# Altium PCB pcb_emmeteur.PcbDoc
Units mil, origin at the board's own origin, x right, y up, seen from the top; angles counter-clockwise.
Board outline 2625 x 2355 mil, 4 copper layers (Top Layer, Internal Plane 1, Internal Plane 2, Bottom Layer); 28 components, 22 nets, 93 pads, 0 vias.
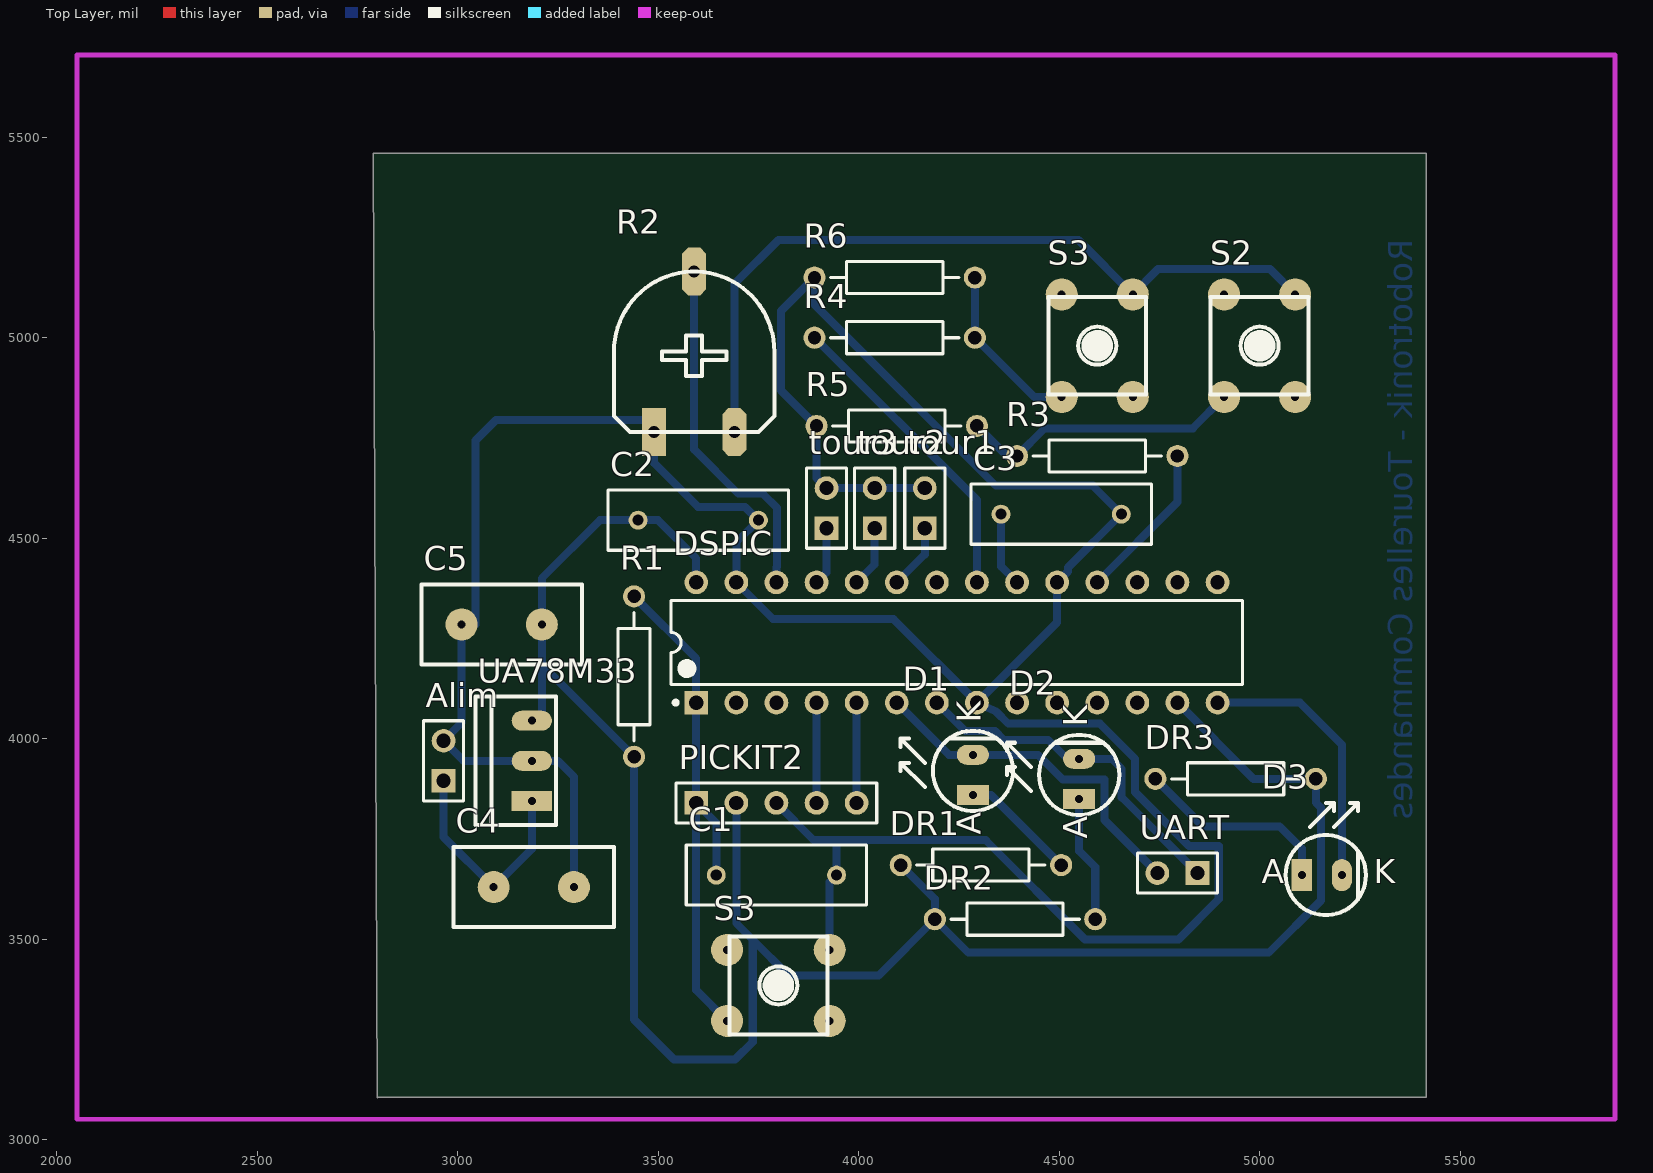
[diagram p0: Top Layer view]
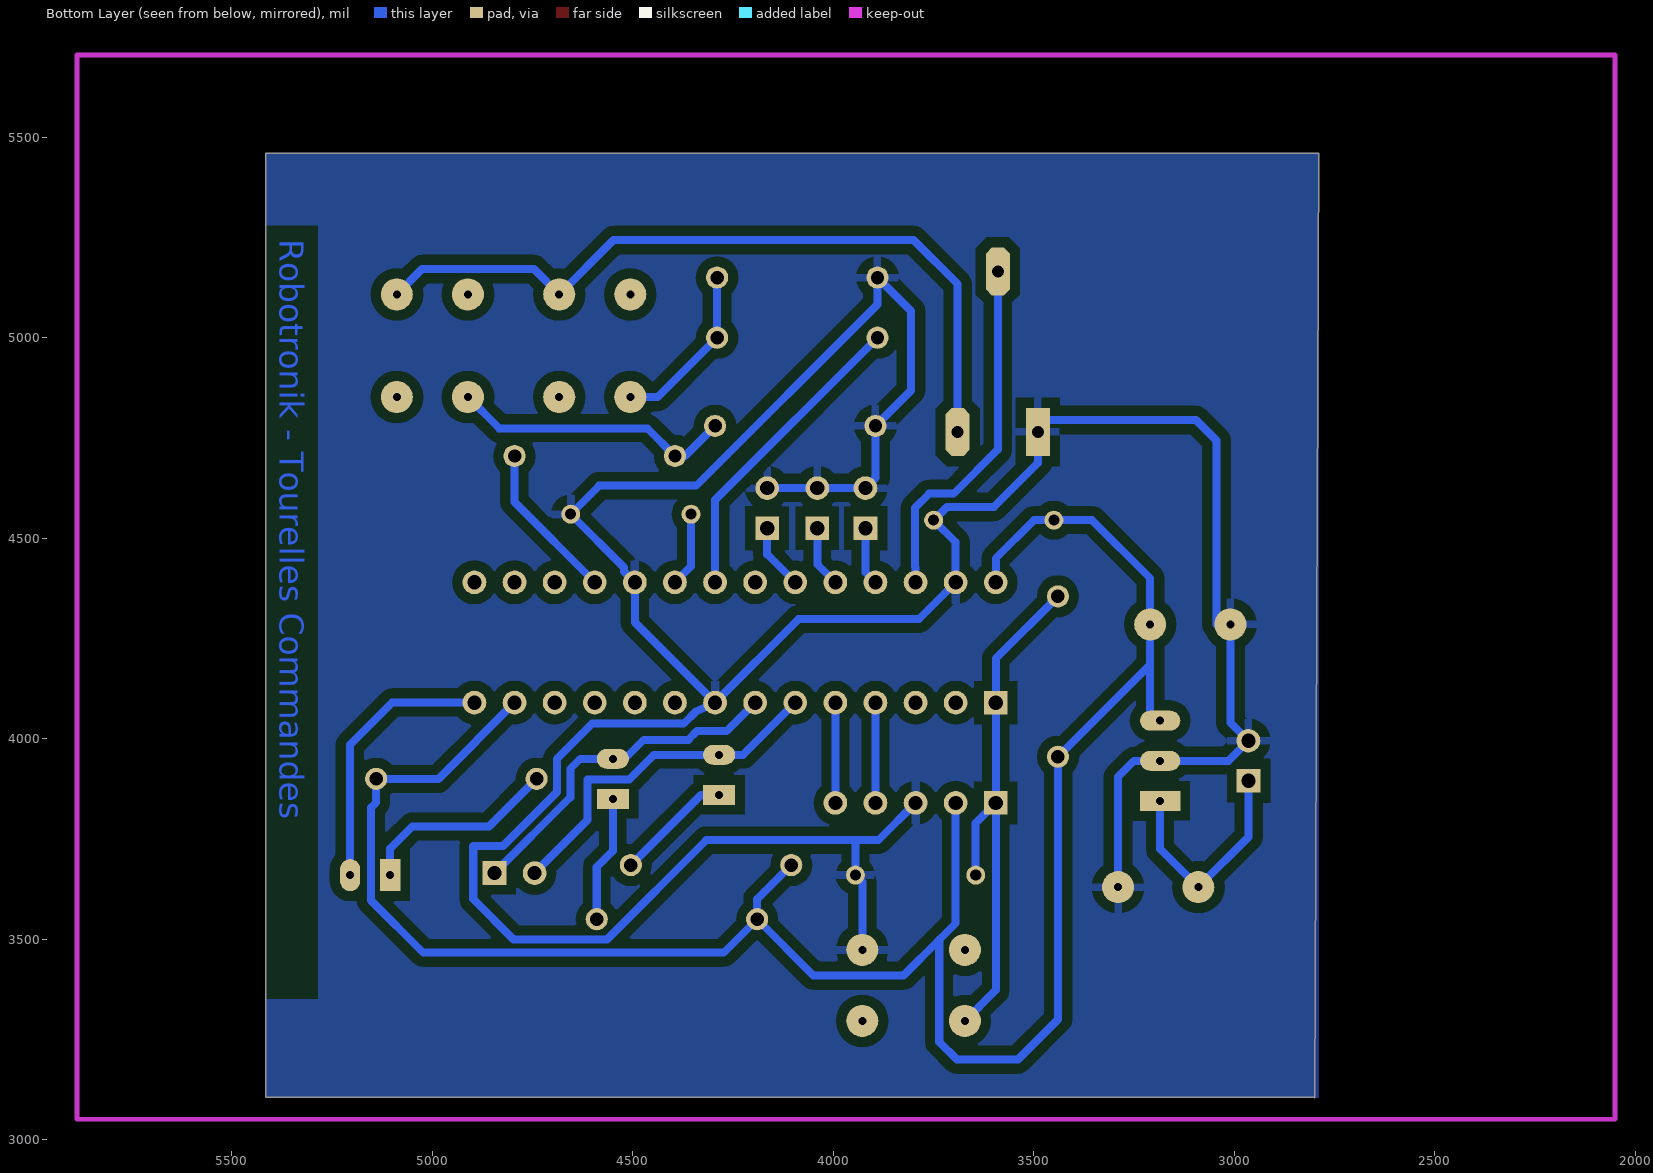
[diagram p1: Bottom Layer view, seen from below]
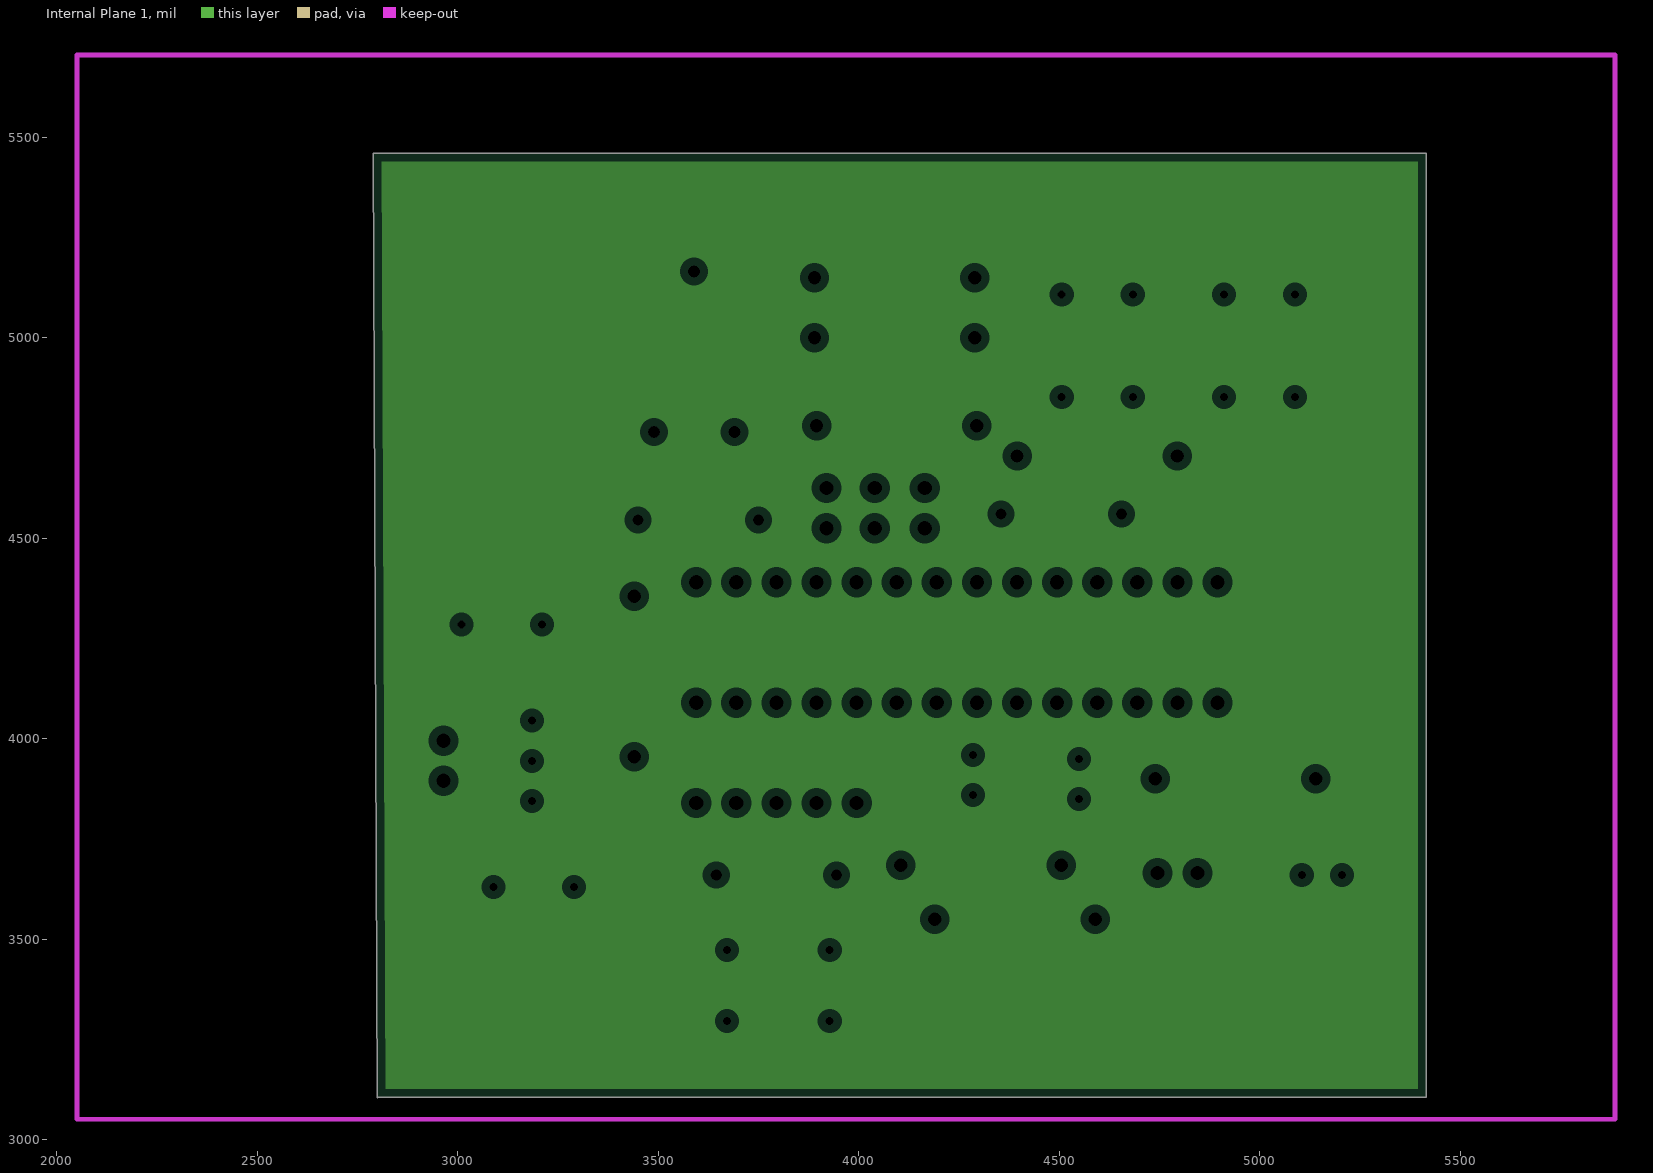
[diagram p2: Internal Plane 1, clearances drawn from the general rule]
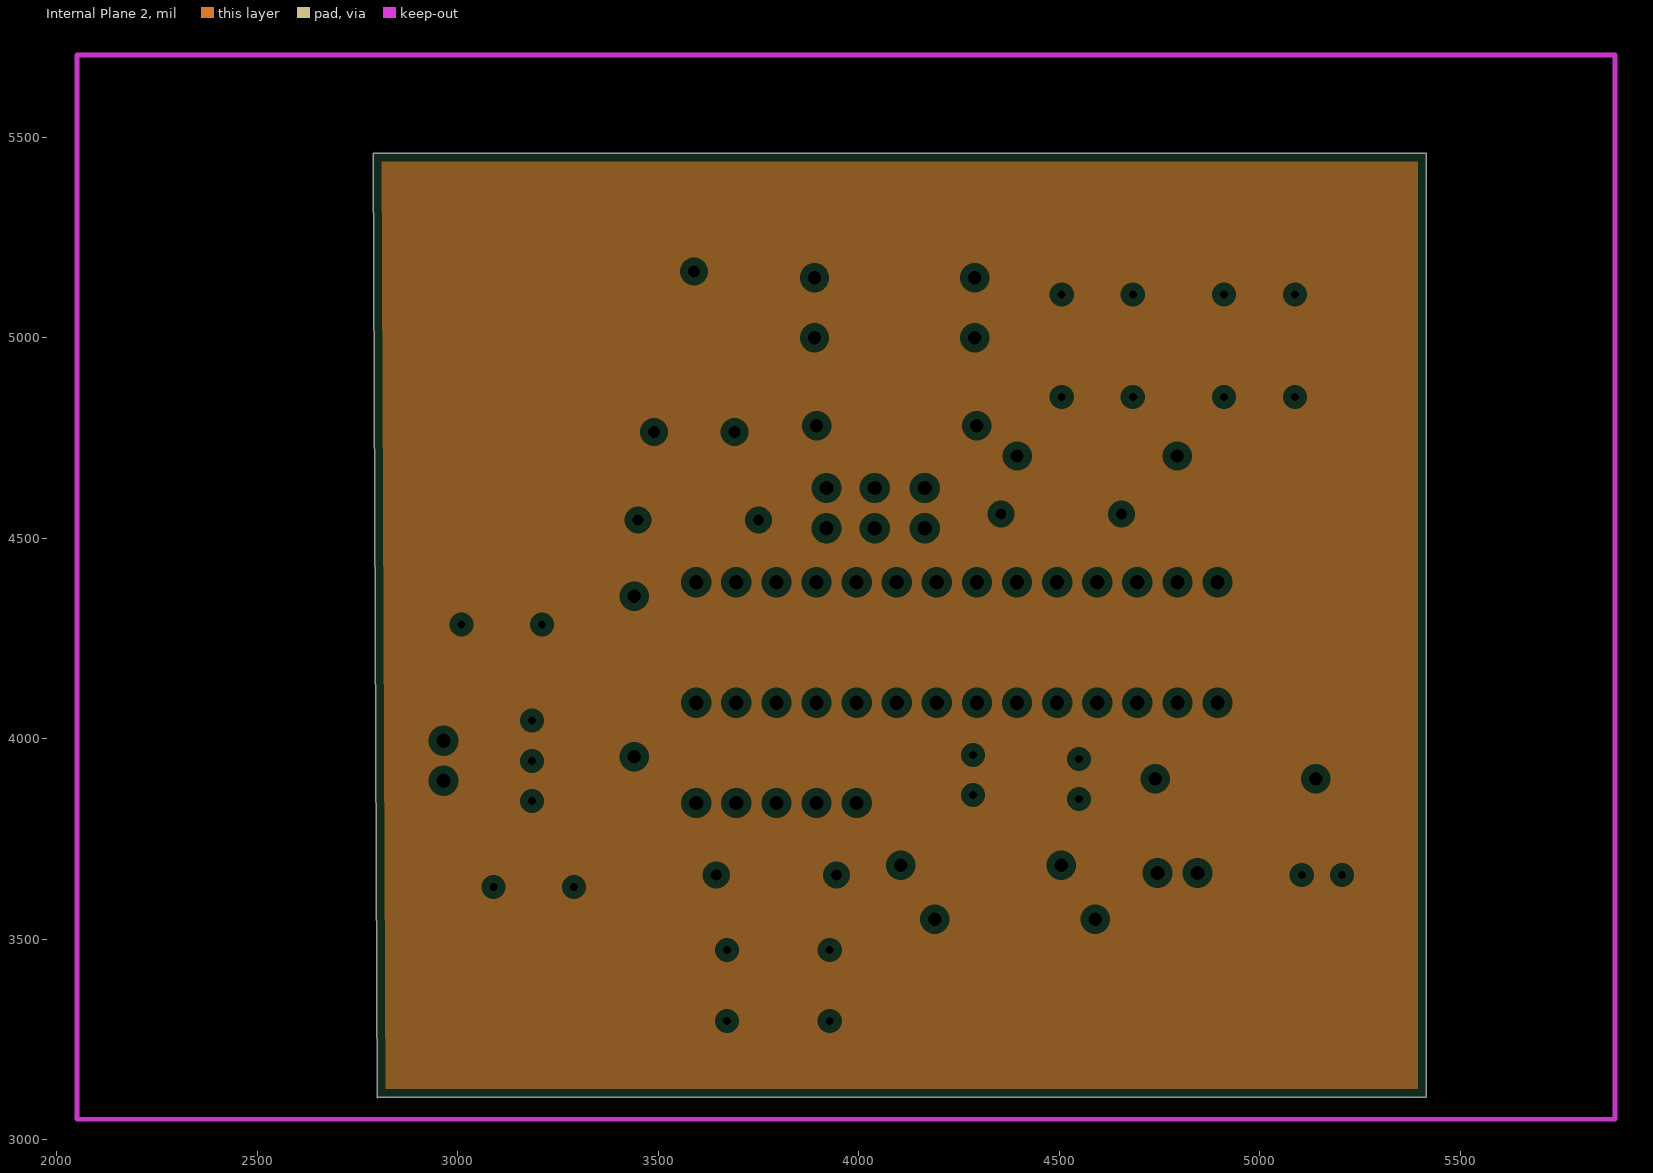
[diagram p3: Internal Plane 2, clearances drawn from the general rule]

## Layer stack, top to bottom
Top Layer: signal copper 1.4
Dielectric: dielectric 12.6, FR-4, Dk 4.8
Internal Plane 1: plane copper 1.4
Dielectric: dielectric 12.6, FR-4, Dk 4.8
Internal Plane 2: plane copper 1.4
Dielectric: dielectric 12.6, FR-4, Dk 4.8
Bottom Layer: signal copper 1.4

## Board outline
2790,5460 5415,5460 5415,3106.53 2801.53,3106.53 2800,3105

## Design rules (kind name [scope] priority, off if disabled: settings)
Clearance [All] p1: gap=13
FabricationTestPointUsage TestPointUsage [All] p1: valid=0 allowmultiple=FALSE
FabricationTestpoint Testpoint [All] p1: side=3 testpointundercomponent=TRUE minsize=40 maxsize=100 preferedsize=60 minholesize=0 maxholesize=40 preferedholesize=32 testpointgrid=1 allowsidetop=TRUE allowsidebottom=TRUE usegrid=TRUE gridtolerance=0.01
PlaneClearance [All] p1: clearance=20
PlaneConnect [All] p1: planeconnectstyle=Relief reliefexpansion=20 reliefentries=4 reliefconductorwidth=10 reliefairgap=10
PolygonConnect [All] p1: connectstyle=Relief reliefconductorwidth=20 reliefentries=4 polygonreliefangle="90 Angle"
RoutingLayers [All] p1: top layer_v5=FALSE bottom layer_v5=TRUE
RoutingVias [All] p1: holewidth=20 width=60 viastyle="Through Hole" minholewidth=28 minwidth=60 maxholewidth=28 maxwidth=60
SilkscreenOverComponentPads [All] p1: minsilkscreentomaskgap=10
SolderMaskExpansion [All] p1: expansion=4
Width [All] p1: maxlimit=20 minlimit=20 preferedwidth=20
22 further rules are at their usual default settings.

## Components (designator, comment, footprint, x,y, rotation, side; value= is the part's Value field where it differs from the comment)
Alim "Header 2" HDR1X2 2965,3895 r90 top
C1 "Cap" RAD-0.3 3795,3660 r180 top
C2 "Cap" RAD-0.3 3600,4545 r180 top
C3 "Cap" RAD-0.3 4505,4560 r180 top
C4 "Cap2" CAPA2 3290,3630 r180 top
C5 "Cap2" CAPA2 3010,4285 r0 top
D1 "Led Verte" LED 4285,3860 r90 top
D2 "Led Orange" LED 4550,3850 r90 top
D3 "Led Rouge" LED 5105,3660 r0 top
DR1 "Res2" AXIAL-0.4 4305,3685 r180 top
DR2 "Res2" AXIAL-0.4 4390,3550 r180 top
DR3 "Res2" AXIAL-0.4 4940,3900 r0 top
DSPIC "DSPIC33FJ128MC802-I/SP" SPDIP300-SP28 4245,4240 r90 top
PICKIT2 "Header 5H" HDR1X5 3595,3840 r0 top
R1 "Res2" AXIAL-0.4 3440,4155 r270 top
R2 "RPot" AJUSTABLE 3490,4765 r0 top
R3 "Res2" AXIAL-0.4 4595,4705 r180 top
R4 "Res2" AXIAL-0.4 4090,5000 r0 top
R5 "Res2" AXIAL-0.4 4095,4780 r0 top
R6 "Res2" AXIAL-0.4 4090,5150 r0 top
S2 "SW-PB" SW_BP 5000,4980 r90 top
S3 "SW-PB" SW_BP 4595,4980 r90 top
S3 "SW-PB" SW_BP 3800,3385 r0 top
tour1 "Header 2" HDR1X2 4165,4525 r90 top
tour2 "Header 2" HDR1X2 4040,4525 r90 top
tour3 "Header 2" HDR1X2 3920,4525 r90 top
UA78M33 "LM7805CT" TO220 3185,3845 r90 top
UART "Header 2" HDR1X2 4845,3665 r180 top

## Footprints (in the part's own frame and the unit in brackets; to place one, negate y for a bottom-side part, rotate by r counter-clockwise, add the part's x,y. Pads: shape width x height; smd on the part's side, far side on the other; paste and mask are expansions set on the pad)
AJUSTABLE [mil]
  rect 60x120 hole 30: 1(0,0)
  oct 60x120 hole 30: 2(100,400) 3(200,0)
  silkscreen extent -100,0 300,400
AXIAL-0.4 [mm] "Axial Device, Thru-Hole; 2 Leads; 0.4 in Pin Spacing"
  round 1.4 hole 0.85: 1(-5.08,0) 2(5.08,0)
  silkscreen extent -4.06,-1.02 4.06,1.02
CAPA2 [mil]
  round 80 hole 20: 1(0,0) 2(200,0)
  silkscreen extent -100,-100 300,100
HDR1X2 [mm] "Connector; Header; 2 Position"
  rect 1.5x1.5 hole 0.9: 1(0,0)
  round 1.5 hole 0.9: 2(2.54,0)
  silkscreen extent -1.27,-1.27 3.81,1.27
HDR1X5 [mm] "Connector; Header; 5 Position"
  rect 1.5x1.5 hole 0.9: 1(0,0)
  round 1.5 hole 0.9: 2(2.54,0) 3(5.08,0) 4(7.62,0) 5(10.16,0)
  silkscreen extent -1.27,-1.27 11.43,1.27
LED [mil]
  rect 50x80 hole 20: 1(0,0)
  oval 50x80 hole 20: 2(100,0)
  silkscreen extent -40,-100 160,180
RAD-0.3 [mm] "Radial Cap, Thru-Hole; 2 Leads; 0.3 in Pin Spacing"
  round 1.2 hole 0.7: 1(-3.81,0) 2(3.81,0)
  silkscreen extent -5.71,-1.91 5.71,1.91
SPDIP300-SP28 [mm] "DIP, 28-Leads, Row Spacing 7.62mm, Pitch 2.54mm, Body 34.9x6.8mm"
  rect 1.5x1.5 hole 0.9: 1(-3.81,16.51)
  round 1.5 hole 0.9: 2(-3.81,13.97) 3(-3.81,11.43) 4(-3.81,8.89) 5(-3.81,6.35) 6(-3.81,3.81) 7(-3.81,1.27) 8(-3.81,-1.27) 9(-3.81,-3.81) 10(-3.81,-6.35) 11(-3.81,-8.89) 12(-3.81,-11.43) 13(-3.81,-13.97) 14(-3.81,-16.51) 15(3.81,-16.51) 16(3.81,-13.97) 17(3.81,-11.43) 18(3.81,-8.89) 19(3.81,-6.35) 20(3.81,-3.81) 21(3.81,-1.27) 22(3.81,1.27) 23(3.81,3.81) 24(3.81,6.35) 25(3.81,8.89) 26(3.81,11.43) 27(3.81,13.97) 28(3.81,16.51)
  silkscreen extent -3.93,-18.1 2.65,18.1, body extent -3.55,-18.1 3.55,18.1, height 5.08
SW_BP [mil]
  round 80 hole 20: 1(-127.95,88.58) 2(127.95,88.58) 3(-127.95,-88.58) 4(127.95,-88.58)
  silkscreen extent -122,-122 122,122
TO220 [mil]
  rect 50x100 hole 20: 1(0,0)
  oval 50x100 hole 20: 2(100,0) 3(200,0)
  silkscreen extent -60,-60 260,140

## Part data
Alim tour1 tour2 tour3 UART: "Header, 2-Pin"
C1 C2 C3 C4 C5: "Capacitor"
D1 D2 D3: library part Led, "LED"
DR1 DR2 DR3 R1 R3 R4 R5 R6: "Resistor"
DSPIC: "High-Performance 16-bit Digital Signal Controller, 128 KB Flash, 16 KB RAM, 28-Pin SPDIP, Industrial Temperature"
PICKIT2: "Header, 5-Pin, Right Angle"
R2: "Potentiometer"
S2 S3 S3: "Switch"
UA78M33: "Series 3-Terminal Positive Regulator"

## Nets (pads, with @x,y where several pads share a name; then routed paths per layer and width w, separated by ;. In a path a pad name is that pad's centre, name@x,y a point inside that pad or via, vN(x,y) a via of type N, cw(c..) or ccw(c..) an arc to the next point about the centre after c; other vN are vias at no path point)
ALIM: Alim.1 C4.2 UA78M33.1 | length 571.1
  Bottom Layer w20: Alim.1 2965,3755 C4.2 3185,3725 UA78M33.1
AN9: DSPIC.26 R2.2 | length 897.3
  Bottom Layer w20: R2.2 3590,4721 3700,4611 3761,4611 3797,4575 3797,4429 3795,4427 DSPIC.26
DEBUG: D3.2 DSPIC.14 | length 678.5
  Bottom Layer w20: DSPIC.14 5100,4090 5205,3985 D3.2
GND: Alim.2 C1.1 C2.1 C3.1 C4.1 C5.1 DSPIC.8 DSPIC.19 DSPIC.27 PICKIT2.3 R2.1 R5.1 R6.1 S3.2@3927.95,3473.58 tour1.2 tour2.2 tour3.2 UA78M33.2 | length 8247.8
  Bottom Layer w20: C4.1 3290,3905 3250,3945 UA78M33.2 3015,3945 Alim.2 3010,4040 C5.1 3045,4285 3045,4744 3096,4795 3490,4795 R2.1 3490,4688 3600,4578 3717,4578 C2.1 3695,4490 DSPIC.27 3787,4298 4087,4298 DSPIC.8 ; PICKIT2.3 3888,3747 3945,3747 ; S3.2@3927.95,3473.58 3927.95,3642.95 C1.1 3945,3747 ; tour1.2 tour2.2 tour3.2 3895,4650 R5.1 3806.44,4868.56 3806.44,5066.44 R6.1 3890,5083 4342,4631 4584,4631 C3.1 4522,4427 4522,4417 DSPIC.19 4495,4290 DSPIC.8 ; 3945,3747 4317,3747 4564.56,3499.44 4797.44,3499.44 4898,3600 4898,3732.69 4823.98,3732.69 4689.44,3867.23 4689.44,3950 4601.97,4037.47 4373.24,4037.47 4342.71,4068 DSPIC.8
NetC1_2: C1.2 DSPIC.1 PICKIT2.1 R1.1 S3.3@3672.05,3296.42 | length 1355.4
  Bottom Layer w20: R1.1 3595,4200 DSPIC.1 PICKIT2.1 ; C1.2 3645,3790 PICKIT2.1 ; S3.3@3672.05,3296.42 3595,3373.47 PICKIT2.1
NetC3_2: C3.2 DSPIC.20 | length 186.6
  Bottom Layer w20: C3.2 4355,4430 DSPIC.20
NetD1_1: D1.1 DR1.1 | length 292.5
  Bottom Layer w20: D1.1 4330,3860 DR1.1
NetD2_1: D2.1 DR2.1 | length 316.6
  Bottom Layer w20: D2.1 4550,3720 4590,3680 DR2.1
NetD3_1: D3.1 DR3.1 | length 503.1
  Bottom Layer w20: DR3.1 4859,3781 5050,3781 5105,3726 D3.1
NetR3_2: R3.2 R5.2 S2.1 | length 708.4
  Bottom Layer w20: R5.2 4370,4705 R3.2 4464,4774 4833.37,4774 S2.1
NetR4_2: R4.2 R6.2 S3.1@4506.42,4852.05 | length 427.7
  Bottom Layer w20: R6.2 R4.2 4437.95,4852.05 S3.1@4506.42,4852.05
PGC: DSPIC.5 PICKIT2.5 | length 250
  Bottom Layer w20: PICKIT2.5 DSPIC.5
PGD: DSPIC.4 PICKIT2.4 | length 250
  Bottom Layer w20: PICKIT2.4 DSPIC.4
RB9: DSPIC.18 R3.1 | length 397.8
  Bottom Layer w20: DSPIC.18 4795,4590 R3.1
RB10: DSPIC.21 R4.1 | length 777.8
  Bottom Layer w20: R4.1 4295,4595 DSPIC.21
TOUR1: DSPIC.23 tour1.1 | length 164
  Bottom Layer w20: DSPIC.23 4165,4460 tour1.1
TOUR2: DSPIC.24 tour2.1 | length 153.6
  Bottom Layer w20: DSPIC.24 4040,4435 tour2.1
TOUR3: DSPIC.25 tour3.1 | length 145.4
  Bottom Layer w20: DSPIC.25 3920,4415 tour3.1
UART_RX: D2.2 DSPIC.7 UART.1 | length 867.6
  Bottom Layer w20: DSPIC.7 4266.05,4018.95 4340.24,4018.95 4361.84,3997.35 4472.65,3997.35 4520,3950 D2.2 4631,3950 4656,3925 4656,3854 UART.1
UART_TX: D1.2 DSPIC.6 UART.2 | length 885.2
  Bottom Layer w20: DSPIC.6 4225,3960 D1.2 4447,3960 4509,3898 4613,3898 4613,3797 UART.2
VCC: R2.3 S2.4 S3.4@4683.58,5107.95 | length 1921.1
  Bottom Layer w20: R2.3 3690,5133.55 3800,5243.55 4547.99,5243.55 4683.58,5107.95 4746.63,5171 5025.54,5171 S2.4
VDD: C2.2 C5.2 DR1.2 DR2.2 DR3.2 DSPIC.13 DSPIC.28 PICKIT2.2 R1.2 UA78M33.3 | length 5376.1
  Bottom Layer w20: UA78M33.3 3210,4045 3210,4185 ; DSPIC.28 3595,4450 3500,4545 C2.2 3355,4545 3210,4400 C5.2 3210,4185 ; PICKIT2.2 3695,3540 3736,3499 ; DR1.2 4190,3600 DR2.2 ; DSPIC.13 4985,3900 DR3.2 5140,3841 5153,3828 5153,3597 5022.44,3466.44 4273.56,3466.44 DR2.2 ; 3210,4185 R1.2 3440,3300 3540,3200 3692,3200 3736,3244 3736,3499 ; 3736,3499 3825,3410 4050,3410 DR2.2
pads on no net: DSPIC.2 DSPIC.3 DSPIC.9 DSPIC.10 DSPIC.11 DSPIC.12 DSPIC.15 DSPIC.16 DSPIC.17 DSPIC.22 S2.2 S2.3 S3.1@3672.05,3473.58 S3.2@4506.42,5107.95 S3.3@4683.58,4852.05 S3.4@3927.95,3296.42

## Polygon pours and split planes (outlines as drawn)
GND on Bottom Layer "Top Layer-No Net" (solid, pour order 2): 2790,5460 5415,5460 5415,3100 5410,3105 2790,3105
no net on Internal Plane 1 (split plane): 5394.9,3126.63 2820.01,3126.63 2810.18,5439.9 5394.9,5439.9
no net on Internal Plane 2 (split plane): 5394.9,3126.63 2820.01,3126.63 2810.18,5439.9 5394.9,5439.9

## Keep-outs
Keep-Out Layer:
  lines w11.81: 2051.18,3051.18 2051.18,5704.72 5885.83,5704.72 5885.83,3051.18 2051.18,3051.18

## Other copper
Bottom Layer:
  text "Robotronik - Tourelles Commandes" at 5380,5245 h60 r90

## Dimensions
2051.18,3051.18 to 2051.18,5704.72 on Mechanical 1
2051.18,3051.18 to 5885.83,3051.18 on Mechanical 1

## Text inside footprints (layer, text, board x,y; h text height)
D1: Top Overlay "A" at 4305,3760 h60 r90; Top Overlay "K" at 4305,4040 h60 r90
D2: Top Overlay "A" at 4570,3750 h60 r90; Top Overlay "K" at 4570,4030 h60 r90
D3: Top Overlay "A" at 5005,3640 h60; Top Overlay "K" at 5285,3640 h60